# EAGLE board vscore via 1 (EAGLE 6.3), part 1 of 2
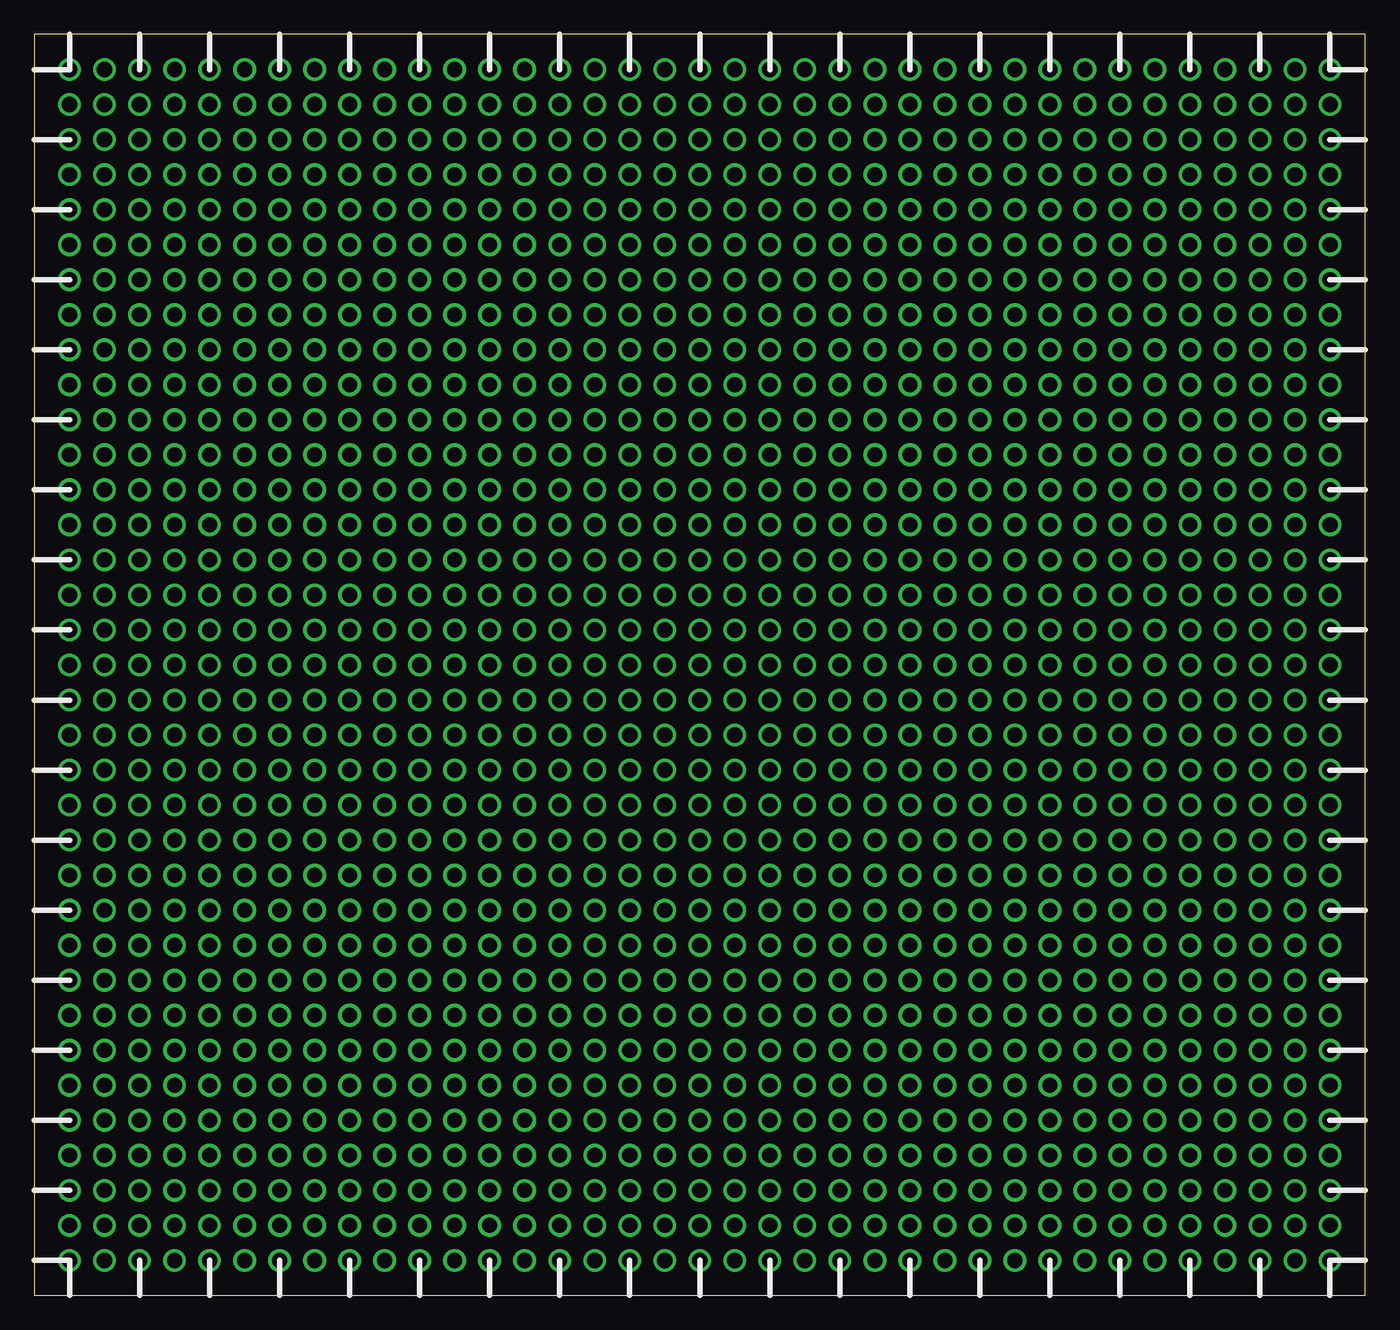
[diagram p0: board, top side]

Size 96.52 x 91.44 mm. Coordinates in mm from the lower left corner, seen from the top.
Outline: 0,0 96.52,0 96.52,91.44 0,91.44 0,0
Copper layers (1*16): Top 0.035mm / dielectric 1.5mm / Bottom 0.035mm
Design rules "default": minimum track width 10mil, minimum drill 24mil, track to track 8mil, track to pad 8mil, pad to pad 8mil, via to via 8mil, smd to smd 8mil, copper to edge 40mil, drill to drill 8mil, minimum pad ring 10mil, minimum via ring 8mil, stop-mask expansion 4mil, vias tented up to drill 0mil, thermal gap 10mil

## Placement (x,y rotation side)
E$1  [IMAGE_GERBER_FRAME]  -50.8,-63.5 0 top  (outside the outline)

## Library data of the parts
E$1 = miniPCB_ENGDWG

## Tracks (layer width: path | path; a pad name or v marks a point on that pad's centre or on a via)
S$1  (via drill 1.1)
  other vias: 2.54,2.54
S$2  (via drill 1.1)
  other vias: 5.08,2.54
S$3  (via drill 1.1)
  other vias: 7.62,2.54
S$4  (via drill 1.1)
  other vias: 10.16,2.54
S$5  (via drill 1.1)
  other vias: 12.7,2.54
S$6  (via drill 1.1)
  other vias: 15.24,2.54
S$7  (via drill 1.1)
  other vias: 17.78,2.54
S$8  (via drill 1.1)
  other vias: 20.32,2.54
S$9  (via drill 1.1)
  other vias: 22.86,2.54
S$10  (via drill 1.1)
  other vias: 25.4,2.54
S$11  (via drill 1.1)
  other vias: 27.94,2.54
S$12  (via drill 1.1)
  other vias: 30.48,2.54
S$13  (via drill 1.1)
  other vias: 33.02,2.54
S$14  (via drill 1.1)
  other vias: 35.56,2.54
S$15  (via drill 1.1)
  other vias: 38.1,2.54
S$16  (via drill 1.1)
  other vias: 40.64,2.54
S$17  (via drill 1.1)
  other vias: 43.18,2.54
S$18  (via drill 1.1)
  other vias: 45.72,2.54
S$19  (via drill 1.1)
  other vias: 48.26,2.54
S$20  (via drill 1.1)
  other vias: 50.8,2.54
S$21  (via drill 1.1)
  other vias: 53.34,2.54
S$22  (via drill 1.1)
  other vias: 55.88,2.54
S$23  (via drill 1.1)
  other vias: 58.42,2.54
S$24  (via drill 1.1)
  other vias: 60.96,2.54
S$25  (via drill 1.1)
  other vias: 63.5,2.54
S$26  (via drill 1.1)
  other vias: 66.04,2.54
S$27  (via drill 1.1)
  other vias: 68.58,2.54
S$28  (via drill 1.1)
  other vias: 71.12,2.54
S$29  (via drill 1.1)
  other vias: 73.66,2.54
S$30  (via drill 1.1)
  other vias: 76.2,2.54
S$31  (via drill 1.1)
  other vias: 78.74,2.54
S$32  (via drill 1.1)
  other vias: 81.28,2.54
S$33  (via drill 1.1)
  other vias: 83.82,2.54
S$34  (via drill 1.1)
  other vias: 86.36,2.54
S$35  (via drill 1.1)
  other vias: 88.9,2.54
S$36  (via drill 1.1)
  other vias: 91.44,2.54
S$37  (via drill 1.1)
  other vias: 93.98,2.54
S$39  (via drill 1.1)
  other vias: 2.54,5.08
S$40  (via drill 1.1)
  other vias: 5.08,5.08
S$41  (via drill 1.1)
  other vias: 7.62,5.08
S$42  (via drill 1.1)
  other vias: 10.16,5.08
S$43  (via drill 1.1)
  other vias: 12.7,5.08
S$44  (via drill 1.1)
  other vias: 15.24,5.08
S$45  (via drill 1.1)
  other vias: 17.78,5.08
S$46  (via drill 1.1)
  other vias: 20.32,5.08
S$47  (via drill 1.1)
  other vias: 22.86,5.08
S$48  (via drill 1.1)
  other vias: 25.4,5.08
S$49  (via drill 1.1)
  other vias: 27.94,5.08
S$50  (via drill 1.1)
  other vias: 30.48,5.08
S$51  (via drill 1.1)
  other vias: 33.02,5.08
S$52  (via drill 1.1)
  other vias: 35.56,5.08
S$53  (via drill 1.1)
  other vias: 38.1,5.08
S$54  (via drill 1.1)
  other vias: 40.64,5.08
S$55  (via drill 1.1)
  other vias: 43.18,5.08
S$56  (via drill 1.1)
  other vias: 45.72,5.08
S$57  (via drill 1.1)
  other vias: 48.26,5.08
S$58  (via drill 1.1)
  other vias: 50.8,5.08
S$59  (via drill 1.1)
  other vias: 53.34,5.08
S$60  (via drill 1.1)
  other vias: 55.88,5.08
S$61  (via drill 1.1)
  other vias: 58.42,5.08
S$62  (via drill 1.1)
  other vias: 60.96,5.08
S$63  (via drill 1.1)
  other vias: 63.5,5.08
S$64  (via drill 1.1)
  other vias: 66.04,5.08
S$65  (via drill 1.1)
  other vias: 68.58,5.08
S$66  (via drill 1.1)
  other vias: 71.12,5.08
S$67  (via drill 1.1)
  other vias: 73.66,5.08
S$68  (via drill 1.1)
  other vias: 76.2,5.08
S$69  (via drill 1.1)
  other vias: 78.74,5.08
S$70  (via drill 1.1)
  other vias: 81.28,5.08
S$71  (via drill 1.1)
  other vias: 83.82,5.08
S$72  (via drill 1.1)
  other vias: 86.36,5.08
S$73  (via drill 1.1)
  other vias: 88.9,5.08
S$74  (via drill 1.1)
  other vias: 91.44,5.08
S$75  (via drill 1.1)
  other vias: 93.98,5.08
S$77  (via drill 1.1)
  other vias: 2.54,7.62
S$78  (via drill 1.1)
  other vias: 5.08,7.62
S$79  (via drill 1.1)
  other vias: 7.62,7.62
S$80  (via drill 1.1)
  other vias: 10.16,7.62
S$81  (via drill 1.1)
  other vias: 12.7,7.62
S$82  (via drill 1.1)
  other vias: 15.24,7.62
S$83  (via drill 1.1)
  other vias: 17.78,7.62
S$84  (via drill 1.1)
  other vias: 20.32,7.62
S$85  (via drill 1.1)
  other vias: 22.86,7.62
S$86  (via drill 1.1)
  other vias: 25.4,7.62
S$87  (via drill 1.1)
  other vias: 27.94,7.62
S$88  (via drill 1.1)
  other vias: 30.48,7.62
S$89  (via drill 1.1)
  other vias: 33.02,7.62
S$90  (via drill 1.1)
  other vias: 35.56,7.62
S$91  (via drill 1.1)
  other vias: 38.1,7.62
S$92  (via drill 1.1)
  other vias: 40.64,7.62
S$93  (via drill 1.1)
  other vias: 43.18,7.62
S$94  (via drill 1.1)
  other vias: 45.72,7.62
S$95  (via drill 1.1)
  other vias: 48.26,7.62
S$96  (via drill 1.1)
  other vias: 50.8,7.62
S$97  (via drill 1.1)
  other vias: 53.34,7.62
S$98  (via drill 1.1)
  other vias: 55.88,7.62
S$99  (via drill 1.1)
  other vias: 58.42,7.62
S$100  (via drill 1.1)
  other vias: 60.96,7.62
S$101  (via drill 1.1)
  other vias: 63.5,7.62
S$102  (via drill 1.1)
  other vias: 66.04,7.62
S$103  (via drill 1.1)
  other vias: 68.58,7.62
S$104  (via drill 1.1)
  other vias: 71.12,7.62
S$105  (via drill 1.1)
  other vias: 73.66,7.62
S$106  (via drill 1.1)
  other vias: 76.2,7.62
S$107  (via drill 1.1)
  other vias: 78.74,7.62
S$108  (via drill 1.1)
  other vias: 81.28,7.62
S$109  (via drill 1.1)
  other vias: 83.82,7.62
S$110  (via drill 1.1)
  other vias: 86.36,7.62
S$111  (via drill 1.1)
  other vias: 88.9,7.62
S$112  (via drill 1.1)
  other vias: 91.44,7.62
S$113  (via drill 1.1)
  other vias: 93.98,7.62
S$115  (via drill 1.1)
  other vias: 2.54,10.16
S$116  (via drill 1.1)
  other vias: 5.08,10.16
S$117  (via drill 1.1)
  other vias: 7.62,10.16
S$118  (via drill 1.1)
  other vias: 10.16,10.16
S$119  (via drill 1.1)
  other vias: 12.7,10.16
S$120  (via drill 1.1)
  other vias: 15.24,10.16
S$121  (via drill 1.1)
  other vias: 17.78,10.16
S$122  (via drill 1.1)
  other vias: 20.32,10.16
S$123  (via drill 1.1)
  other vias: 22.86,10.16
S$124  (via drill 1.1)
  other vias: 25.4,10.16
S$125  (via drill 1.1)
  other vias: 27.94,10.16
S$126  (via drill 1.1)
  other vias: 30.48,10.16
S$127  (via drill 1.1)
  other vias: 33.02,10.16
S$128  (via drill 1.1)
  other vias: 35.56,10.16
S$129  (via drill 1.1)
  other vias: 38.1,10.16
S$130  (via drill 1.1)
  other vias: 40.64,10.16
S$131  (via drill 1.1)
  other vias: 43.18,10.16
S$132  (via drill 1.1)
  other vias: 45.72,10.16
S$133  (via drill 1.1)
  other vias: 48.26,10.16
S$134  (via drill 1.1)
  other vias: 50.8,10.16
S$135  (via drill 1.1)
  other vias: 53.34,10.16
S$136  (via drill 1.1)
  other vias: 55.88,10.16
S$137  (via drill 1.1)
  other vias: 58.42,10.16
S$138  (via drill 1.1)
  other vias: 60.96,10.16
S$139  (via drill 1.1)
  other vias: 63.5,10.16
S$140  (via drill 1.1)
  other vias: 66.04,10.16
S$141  (via drill 1.1)
  other vias: 68.58,10.16
S$142  (via drill 1.1)
  other vias: 71.12,10.16
S$143  (via drill 1.1)
  other vias: 73.66,10.16
S$144  (via drill 1.1)
  other vias: 76.2,10.16
S$145  (via drill 1.1)
  other vias: 78.74,10.16
S$146  (via drill 1.1)
  other vias: 81.28,10.16
S$147  (via drill 1.1)
  other vias: 83.82,10.16
S$148  (via drill 1.1)
  other vias: 86.36,10.16
S$149  (via drill 1.1)
  other vias: 88.9,10.16
S$150  (via drill 1.1)
  other vias: 91.44,10.16
S$151  (via drill 1.1)
  other vias: 93.98,10.16
S$153  (via drill 1.1)
  other vias: 2.54,12.7
S$154  (via drill 1.1)
  other vias: 5.08,12.7
S$155  (via drill 1.1)
  other vias: 7.62,12.7
S$156  (via drill 1.1)
  other vias: 10.16,12.7
S$157  (via drill 1.1)
  other vias: 12.7,12.7
S$158  (via drill 1.1)
  other vias: 15.24,12.7
S$159  (via drill 1.1)
  other vias: 17.78,12.7
S$160  (via drill 1.1)
  other vias: 20.32,12.7
S$161  (via drill 1.1)
  other vias: 22.86,12.7
S$162  (via drill 1.1)
  other vias: 25.4,12.7
S$163  (via drill 1.1)
  other vias: 27.94,12.7
S$164  (via drill 1.1)
  other vias: 30.48,12.7
S$165  (via drill 1.1)
  other vias: 33.02,12.7
S$166  (via drill 1.1)
  other vias: 35.56,12.7
S$167  (via drill 1.1)
  other vias: 38.1,12.7
S$168  (via drill 1.1)
  other vias: 40.64,12.7
S$169  (via drill 1.1)
  other vias: 43.18,12.7
S$170  (via drill 1.1)
  other vias: 45.72,12.7
S$171  (via drill 1.1)
  other vias: 48.26,12.7
S$172  (via drill 1.1)
  other vias: 50.8,12.7
S$173  (via drill 1.1)
  other vias: 53.34,12.7
S$174  (via drill 1.1)
  other vias: 55.88,12.7
S$175  (via drill 1.1)
  other vias: 58.42,12.7
S$176  (via drill 1.1)
  other vias: 60.96,12.7
S$177  (via drill 1.1)
  other vias: 63.5,12.7
S$178  (via drill 1.1)
  other vias: 66.04,12.7
S$179  (via drill 1.1)
  other vias: 68.58,12.7
S$180  (via drill 1.1)
  other vias: 71.12,12.7
S$181  (via drill 1.1)
  other vias: 73.66,12.7
S$182  (via drill 1.1)
  other vias: 76.2,12.7
S$183  (via drill 1.1)
  other vias: 78.74,12.7
S$184  (via drill 1.1)
  other vias: 81.28,12.7
S$185  (via drill 1.1)
  other vias: 83.82,12.7
S$186  (via drill 1.1)
  other vias: 86.36,12.7
S$187  (via drill 1.1)
  other vias: 88.9,12.7
S$188  (via drill 1.1)
  other vias: 91.44,12.7
S$189  (via drill 1.1)
  other vias: 93.98,12.7
S$191  (via drill 1.1)
  other vias: 2.54,15.24
S$192  (via drill 1.1)
  other vias: 5.08,15.24
S$193  (via drill 1.1)
  other vias: 7.62,15.24
S$194  (via drill 1.1)
  other vias: 10.16,15.24
S$195  (via drill 1.1)
  other vias: 12.7,15.24
S$196  (via drill 1.1)
  other vias: 15.24,15.24
S$197  (via drill 1.1)
  other vias: 17.78,15.24
S$198  (via drill 1.1)
  other vias: 20.32,15.24
S$199  (via drill 1.1)
  other vias: 22.86,15.24
S$200  (via drill 1.1)
  other vias: 25.4,15.24
S$201  (via drill 1.1)
  other vias: 27.94,15.24
S$202  (via drill 1.1)
  other vias: 30.48,15.24
S$203  (via drill 1.1)
  other vias: 33.02,15.24
S$204  (via drill 1.1)
  other vias: 35.56,15.24
S$205  (via drill 1.1)
  other vias: 38.1,15.24
S$206  (via drill 1.1)
  other vias: 40.64,15.24
S$207  (via drill 1.1)
  other vias: 43.18,15.24
S$208  (via drill 1.1)
  other vias: 45.72,15.24
S$209  (via drill 1.1)
  other vias: 48.26,15.24
S$210  (via drill 1.1)
  other vias: 50.8,15.24
S$211  (via drill 1.1)
  other vias: 53.34,15.24
S$212  (via drill 1.1)
  other vias: 55.88,15.24
S$213  (via drill 1.1)
  other vias: 58.42,15.24
S$214  (via drill 1.1)
  other vias: 60.96,15.24
S$215  (via drill 1.1)
  other vias: 63.5,15.24
S$216  (via drill 1.1)
  other vias: 66.04,15.24
S$217  (via drill 1.1)
  other vias: 68.58,15.24
S$218  (via drill 1.1)
  other vias: 71.12,15.24
S$219  (via drill 1.1)
  other vias: 73.66,15.24
S$220  (via drill 1.1)
  other vias: 76.2,15.24
S$221  (via drill 1.1)
  other vias: 78.74,15.24
S$222  (via drill 1.1)
  other vias: 81.28,15.24
S$223  (via drill 1.1)
  other vias: 83.82,15.24
S$224  (via drill 1.1)
  other vias: 86.36,15.24
S$225  (via drill 1.1)
  other vias: 88.9,15.24
S$226  (via drill 1.1)
  other vias: 91.44,15.24
S$227  (via drill 1.1)
  other vias: 93.98,15.24
S$229  (via drill 1.1)
  other vias: 2.54,17.78
S$230  (via drill 1.1)
  other vias: 5.08,17.78
S$231  (via drill 1.1)
  other vias: 7.62,17.78
S$232  (via drill 1.1)
  other vias: 10.16,17.78
S$233  (via drill 1.1)
  other vias: 12.7,17.78
S$234  (via drill 1.1)
  other vias: 15.24,17.78
S$235  (via drill 1.1)
  other vias: 17.78,17.78
S$236  (via drill 1.1)
  other vias: 20.32,17.78
S$237  (via drill 1.1)
  other vias: 22.86,17.78
S$238  (via drill 1.1)
  other vias: 25.4,17.78
S$239  (via drill 1.1)
  other vias: 27.94,17.78
S$240  (via drill 1.1)
  other vias: 30.48,17.78
S$241  (via drill 1.1)
  other vias: 33.02,17.78
S$242  (via drill 1.1)
  other vias: 35.56,17.78
S$243  (via drill 1.1)
  other vias: 38.1,17.78
S$244  (via drill 1.1)
  other vias: 40.64,17.78
S$245  (via drill 1.1)
  other vias: 43.18,17.78
S$246  (via drill 1.1)
  other vias: 45.72,17.78
S$247  (via drill 1.1)
  other vias: 48.26,17.78
S$248  (via drill 1.1)
  other vias: 50.8,17.78
S$249  (via drill 1.1)
  other vias: 53.34,17.78
S$250  (via drill 1.1)
  other vias: 55.88,17.78
S$251  (via drill 1.1)
  other vias: 58.42,17.78
S$252  (via drill 1.1)
  other vias: 60.96,17.78
S$253  (via drill 1.1)
  other vias: 63.5,17.78
S$254  (via drill 1.1)
  other vias: 66.04,17.78
S$255  (via drill 1.1)
  other vias: 68.58,17.78
S$256  (via drill 1.1)
  other vias: 71.12,17.78
S$257  (via drill 1.1)
  other vias: 73.66,17.78
S$258  (via drill 1.1)
  other vias: 76.2,17.78
S$259  (via drill 1.1)
  other vias: 78.74,17.78
S$260  (via drill 1.1)
  other vias: 81.28,17.78
S$261  (via drill 1.1)
  other vias: 83.82,17.78
S$262  (via drill 1.1)
  other vias: 86.36,17.78
S$263  (via drill 1.1)
  other vias: 88.9,17.78
S$264  (via drill 1.1)
  other vias: 91.44,17.78
S$265  (via drill 1.1)
  other vias: 93.98,17.78
S$267  (via drill 1.1)
  other vias: 2.54,20.32
S$268  (via drill 1.1)
  other vias: 5.08,20.32
S$269  (via drill 1.1)
  other vias: 7.62,20.32
S$270  (via drill 1.1)
  other vias: 10.16,20.32
S$271  (via drill 1.1)
  other vias: 12.7,20.32
S$272  (via drill 1.1)
  other vias: 15.24,20.32
S$273  (via drill 1.1)
  other vias: 17.78,20.32
S$274  (via drill 1.1)
  other vias: 20.32,20.32
S$275  (via drill 1.1)
  other vias: 22.86,20.32
S$276  (via drill 1.1)
  other vias: 25.4,20.32
S$277  (via drill 1.1)
  other vias: 27.94,20.32
S$278  (via drill 1.1)
  other vias: 30.48,20.32
S$279  (via drill 1.1)
  other vias: 33.02,20.32
S$280  (via drill 1.1)
  other vias: 35.56,20.32
S$281  (via drill 1.1)
  other vias: 38.1,20.32
S$282  (via drill 1.1)
  other vias: 40.64,20.32
S$283  (via drill 1.1)
  other vias: 43.18,20.32
S$284  (via drill 1.1)
  other vias: 45.72,20.32
S$285  (via drill 1.1)
  other vias: 48.26,20.32
S$286  (via drill 1.1)
  other vias: 50.8,20.32
S$287  (via drill 1.1)
  other vias: 53.34,20.32
S$288  (via drill 1.1)
  other vias: 55.88,20.32
S$289  (via drill 1.1)
  other vias: 58.42,20.32
S$290  (via drill 1.1)
  other vias: 60.96,20.32
S$291  (via drill 1.1)
  other vias: 63.5,20.32
S$292  (via drill 1.1)
  other vias: 66.04,20.32
S$293  (via drill 1.1)
  other vias: 68.58,20.32
S$294  (via drill 1.1)
  other vias: 71.12,20.32
S$295  (via drill 1.1)
  other vias: 73.66,20.32
S$296  (via drill 1.1)
  other vias: 76.2,20.32
S$297  (via drill 1.1)
  other vias: 78.74,20.32
S$298  (via drill 1.1)
  other vias: 81.28,20.32
S$299  (via drill 1.1)
  other vias: 83.82,20.32
S$300  (via drill 1.1)
  other vias: 86.36,20.32
S$301  (via drill 1.1)
  other vias: 88.9,20.32
S$302  (via drill 1.1)
  other vias: 91.44,20.32
S$303  (via drill 1.1)
  other vias: 93.98,20.32
S$305  (via drill 1.1)
  other vias: 2.54,22.86
S$306  (via drill 1.1)
  other vias: 5.08,22.86
S$307  (via drill 1.1)
  other vias: 7.62,22.86
S$308  (via drill 1.1)
  other vias: 10.16,22.86
S$309  (via drill 1.1)
  other vias: 12.7,22.86
S$310  (via drill 1.1)
  other vias: 15.24,22.86
S$311  (via drill 1.1)
  other vias: 17.78,22.86
S$312  (via drill 1.1)
  other vias: 20.32,22.86
S$313  (via drill 1.1)
  other vias: 22.86,22.86
S$314  (via drill 1.1)
  other vias: 25.4,22.86
S$315  (via drill 1.1)
  other vias: 27.94,22.86
S$316  (via drill 1.1)
  other vias: 30.48,22.86
S$317  (via drill 1.1)
  other vias: 33.02,22.86
S$318  (via drill 1.1)
  other vias: 35.56,22.86
S$319  (via drill 1.1)
  other vias: 38.1,22.86
S$320  (via drill 1.1)
  other vias: 40.64,22.86
S$321  (via drill 1.1)
  other vias: 43.18,22.86
S$322  (via drill 1.1)
  other vias: 45.72,22.86
S$323  (via drill 1.1)
  other vias: 48.26,22.86
S$324  (via drill 1.1)
  other vias: 50.8,22.86
S$325  (via drill 1.1)
  other vias: 53.34,22.86
S$326  (via drill 1.1)
  other vias: 55.88,22.86
S$327  (via drill 1.1)
  other vias: 58.42,22.86
S$328  (via drill 1.1)
  other vias: 60.96,22.86
S$329  (via drill 1.1)
  other vias: 63.5,22.86
S$330  (via drill 1.1)
  other vias: 66.04,22.86
S$331  (via drill 1.1)
  other vias: 68.58,22.86
S$332  (via drill 1.1)
  other vias: 71.12,22.86
S$333  (via drill 1.1)
  other vias: 73.66,22.86
S$334  (via drill 1.1)
  other vias: 76.2,22.86
S$335  (via drill 1.1)
  other vias: 78.74,22.86
S$336  (via drill 1.1)
  other vias: 81.28,22.86
S$337  (via drill 1.1)
  other vias: 83.82,22.86
S$338  (via drill 1.1)
  other vias: 86.36,22.86
S$339  (via drill 1.1)
  other vias: 88.9,22.86
S$340  (via drill 1.1)
  other vias: 91.44,22.86
S$341  (via drill 1.1)
  other vias: 93.98,22.86
S$343  (via drill 1.1)
  other vias: 2.54,25.4
S$344  (via drill 1.1)
  other vias: 5.08,25.4
S$345  (via drill 1.1)
  other vias: 7.62,25.4
S$346  (via drill 1.1)
  other vias: 10.16,25.4
S$347  (via drill 1.1)
  other vias: 12.7,25.4
S$348  (via drill 1.1)
  other vias: 15.24,25.4
S$349  (via drill 1.1)
  other vias: 17.78,25.4
S$350  (via drill 1.1)
  other vias: 20.32,25.4
S$351  (via drill 1.1)
  other vias: 22.86,25.4
S$352  (via drill 1.1)
  other vias: 25.4,25.4
S$353  (via drill 1.1)
  other vias: 27.94,25.4
S$354  (via drill 1.1)
  other vias: 30.48,25.4
S$355  (via drill 1.1)
  other vias: 33.02,25.4
S$356  (via drill 1.1)
  other vias: 35.56,25.4
S$357  (via drill 1.1)
  other vias: 38.1,25.4
S$358  (via drill 1.1)
  other vias: 40.64,25.4
S$359  (via drill 1.1)
  other vias: 43.18,25.4
S$360  (via drill 1.1)
  other vias: 45.72,25.4
S$361  (via drill 1.1)
  other vias: 48.26,25.4
S$362  (via drill 1.1)
  other vias: 50.8,25.4
S$363  (via drill 1.1)
  other vias: 53.34,25.4
S$364  (via drill 1.1)
  other vias: 55.88,25.4
S$365  (via drill 1.1)
  other vias: 58.42,25.4
S$366  (via drill 1.1)
  other vias: 60.96,25.4
S$367  (via drill 1.1)
  other vias: 63.5,25.4
S$368  (via drill 1.1)
  other vias: 66.04,25.4
S$369  (via drill 1.1)
  other vias: 68.58,25.4
S$370  (via drill 1.1)
  other vias: 71.12,25.4
S$371  (via drill 1.1)
  other vias: 73.66,25.4
S$372  (via drill 1.1)
  other vias: 76.2,25.4
S$373  (via drill 1.1)
  other vias: 78.74,25.4
S$374  (via drill 1.1)
  other vias: 81.28,25.4
S$375  (via drill 1.1)
  other vias: 83.82,25.4
S$376  (via drill 1.1)
  other vias: 86.36,25.4
S$377  (via drill 1.1)
  other vias: 88.9,25.4
S$378  (via drill 1.1)
  other vias: 91.44,25.4
S$379  (via drill 1.1)
  other vias: 93.98,25.4
S$381  (via drill 1.1)
  other vias: 2.54,27.94
S$382  (via drill 1.1)
  other vias: 5.08,27.94
S$383  (via drill 1.1)
  other vias: 7.62,27.94
S$384  (via drill 1.1)
  other vias: 10.16,27.94
S$385  (via drill 1.1)
  other vias: 12.7,27.94
S$386  (via drill 1.1)
  other vias: 15.24,27.94
S$387  (via drill 1.1)
  other vias: 17.78,27.94
S$388  (via drill 1.1)
  other vias: 20.32,27.94
S$389  (via drill 1.1)
  other vias: 22.86,27.94
S$390  (via drill 1.1)
  other vias: 25.4,27.94
S$391  (via drill 1.1)
  other vias: 27.94,27.94
S$392  (via drill 1.1)
  other vias: 30.48,27.94
S$393  (via drill 1.1)
  other vias: 33.02,27.94
S$394  (via drill 1.1)
  other vias: 35.56,27.94
S$395  (via drill 1.1)
  other vias: 38.1,27.94
S$396  (via drill 1.1)
  other vias: 40.64,27.94
S$397  (via drill 1.1)
  other vias: 43.18,27.94
S$398  (via drill 1.1)
  other vias: 45.72,27.94
S$399  (via drill 1.1)
  other vias: 48.26,27.94
S$400  (via drill 1.1)
  other vias: 50.8,27.94
S$401  (via drill 1.1)
  other vias: 53.34,27.94
S$402  (via drill 1.1)
  other vias: 55.88,27.94
S$403  (via drill 1.1)
  other vias: 58.42,27.94
S$404  (via drill 1.1)
  other vias: 60.96,27.94
S$405  (via drill 1.1)
  other vias: 63.5,27.94
S$406  (via drill 1.1)
  other vias: 66.04,27.94
S$407  (via drill 1.1)
  other vias: 68.58,27.94
S$408  (via drill 1.1)
  other vias: 71.12,27.94
S$409  (via drill 1.1)
  other vias: 73.66,27.94
S$410  (via drill 1.1)
  other vias: 76.2,27.94
S$411  (via drill 1.1)
  other vias: 78.74,27.94
S$412  (via drill 1.1)
  other vias: 81.28,27.94
S$413  (via drill 1.1)
  other vias: 83.82,27.94
S$414  (via drill 1.1)
  other vias: 86.36,27.94
S$415  (via drill 1.1)
  other vias: 88.9,27.94
S$416  (via drill 1.1)
  other vias: 91.44,27.94
S$417  (via drill 1.1)
  other vias: 93.98,27.94
S$419  (via drill 1.1)
  other vias: 2.54,30.48
S$420  (via drill 1.1)
  other vias: 5.08,30.48
S$421  (via drill 1.1)
  other vias: 7.62,30.48
S$422  (via drill 1.1)
  other vias: 10.16,30.48
S$423  (via drill 1.1)
  other vias: 12.7,30.48
S$424  (via drill 1.1)
  other vias: 15.24,30.48
S$425  (via drill 1.1)
  other vias: 17.78,30.48
S$426  (via drill 1.1)
  other vias: 20.32,30.48
S$427  (via drill 1.1)
  other vias: 22.86,30.48
S$428  (via drill 1.1)
  other vias: 25.4,30.48
S$429  (via drill 1.1)
  other vias: 27.94,30.48
S$430  (via drill 1.1)
  other vias: 30.48,30.48
S$431  (via drill 1.1)
  other vias: 33.02,30.48
S$432  (via drill 1.1)
  other vias: 35.56,30.48
S$433  (via drill 1.1)
  other vias: 38.1,30.48
S$434  (via drill 1.1)
  other vias: 40.64,30.48
S$435  (via drill 1.1)
  other vias: 43.18,30.48
S$436  (via drill 1.1)
  other vias: 45.72,30.48
S$437  (via drill 1.1)
  other vias: 48.26,30.48
S$438  (via drill 1.1)
  other vias: 50.8,30.48
S$439  (via drill 1.1)
  other vias: 53.34,30.48
S$440  (via drill 1.1)
  other vias: 55.88,30.48
S$441  (via drill 1.1)
  other vias: 58.42,30.48
S$442  (via drill 1.1)
  other vias: 60.96,30.48
S$443  (via drill 1.1)
  other vias: 63.5,30.48
S$444  (via drill 1.1)
  other vias: 66.04,30.48
S$445  (via drill 1.1)
  other vias: 68.58,30.48
S$446  (via drill 1.1)
  other vias: 71.12,30.48
S$447  (via drill 1.1)
  other vias: 73.66,30.48
S$448  (via drill 1.1)
  other vias: 76.2,30.48
S$449  (via drill 1.1)
  other vias: 78.74,30.48
S$450  (via drill 1.1)
  other vias: 81.28,30.48
S$451  (via drill 1.1)
  other vias: 83.82,30.48
S$452  (via drill 1.1)
  other vias: 86.36,30.48
S$453  (via drill 1.1)
  other vias: 88.9,30.48
S$454  (via drill 1.1)
  other vias: 91.44,30.48
S$455  (via drill 1.1)
  other vias: 93.98,30.48
S$457  (via drill 1.1)
  other vias: 2.54,33.02
S$458  (via drill 1.1)
  other vias: 5.08,33.02
S$459  (via drill 1.1)
  other vias: 7.62,33.02
S$460  (via drill 1.1)
  other vias: 10.16,33.02
S$461  (via drill 1.1)
  other vias: 12.7,33.02
S$462  (via drill 1.1)
  other vias: 15.24,33.02
S$463  (via drill 1.1)
  other vias: 17.78,33.02
S$464  (via drill 1.1)
  other vias: 20.32,33.02
S$465  (via drill 1.1)
  other vias: 22.86,33.02
S$466  (via drill 1.1)
  other vias: 25.4,33.02
S$467  (via drill 1.1)
  other vias: 27.94,33.02
S$468  (via drill 1.1)
  other vias: 30.48,33.02
S$469  (via drill 1.1)
  other vias: 33.02,33.02
S$470  (via drill 1.1)
  other vias: 35.56,33.02
S$471  (via drill 1.1)
  other vias: 38.1,33.02
S$472  (via drill 1.1)
  other vias: 40.64,33.02
S$473  (via drill 1.1)
  other vias: 43.18,33.02
S$474  (via drill 1.1)
  other vias: 45.72,33.02
S$475  (via drill 1.1)
  other vias: 48.26,33.02
S$476  (via drill 1.1)
  other vias: 50.8,33.02
S$477  (via drill 1.1)
  other vias: 53.34,33.02
S$478  (via drill 1.1)
  other vias: 55.88,33.02
S$479  (via drill 1.1)
  other vias: 58.42,33.02
S$480  (via drill 1.1)
  other vias: 60.96,33.02
S$481  (via drill 1.1)
  other vias: 63.5,33.02
S$482  (via drill 1.1)
  other vias: 66.04,33.02
S$483  (via drill 1.1)
  other vias: 68.58,33.02
S$484  (via drill 1.1)
  other vias: 71.12,33.02
S$485  (via drill 1.1)
  other vias: 73.66,33.02
S$486  (via drill 1.1)
  other vias: 76.2,33.02
S$487  (via drill 1.1)
  other vias: 78.74,33.02
S$488  (via drill 1.1)
  other vias: 81.28,33.02
S$489  (via drill 1.1)
  other vias: 83.82,33.02
S$490  (via drill 1.1)
  other vias: 86.36,33.02
S$491  (via drill 1.1)
  other vias: 88.9,33.02
S$492  (via drill 1.1)
  other vias: 91.44,33.02
S$493  (via drill 1.1)
  other vias: 93.98,33.02
S$495  (via drill 1.1)
  other vias: 2.54,35.56
S$496  (via drill 1.1)
  other vias: 5.08,35.56
S$497  (via drill 1.1)
  other vias: 7.62,35.56
S$498  (via drill 1.1)
  other vias: 10.16,35.56
S$499  (via drill 1.1)
  other vias: 12.7,35.56
S$500  (via drill 1.1)
  other vias: 15.24,35.56
S$501  (via drill 1.1)
  other vias: 17.78,35.56
S$502  (via drill 1.1)
  other vias: 20.32,35.56
S$503  (via drill 1.1)
  other vias: 22.86,35.56
S$504  (via drill 1.1)
  other vias: 25.4,35.56
S$505  (via drill 1.1)
  other vias: 27.94,35.56
S$506  (via drill 1.1)
  other vias: 30.48,35.56
S$507  (via drill 1.1)
  other vias: 33.02,35.56
S$508  (via drill 1.1)
  other vias: 35.56,35.56
S$509  (via drill 1.1)
  other vias: 38.1,35.56
S$510  (via drill 1.1)
  other vias: 40.64,35.56
S$511  (via drill 1.1)
  other vias: 43.18,35.56
S$512  (via drill 1.1)
  other vias: 45.72,35.56
S$513  (via drill 1.1)
  other vias: 48.26,35.56
S$514  (via drill 1.1)
  other vias: 50.8,35.56
S$515  (via drill 1.1)
  other vias: 53.34,35.56
S$516  (via drill 1.1)
  other vias: 55.88,35.56
S$517  (via drill 1.1)
  other vias: 58.42,35.56
S$518  (via drill 1.1)
  other vias: 60.96,35.56
S$519  (via drill 1.1)
  other vias: 63.5,35.56
S$520  (via drill 1.1)
  other vias: 66.04,35.56
S$521  (via drill 1.1)
  other vias: 68.58,35.56
S$522  (via drill 1.1)
  other vias: 71.12,35.56
S$523  (via drill 1.1)
  other vias: 73.66,35.56
S$524  (via drill 1.1)
  other vias: 76.2,35.56
S$525  (via drill 1.1)
  other vias: 78.74,35.56
S$526  (via drill 1.1)
  other vias: 81.28,35.56
S$527  (via drill 1.1)
  other vias: 83.82,35.56
S$528  (via drill 1.1)
  other vias: 86.36,35.56
S$529  (via drill 1.1)
  other vias: 88.9,35.56
S$530  (via drill 1.1)
  other vias: 91.44,35.56
S$531  (via drill 1.1)
  other vias: 93.98,35.56
S$533  (via drill 1.1)
  other vias: 2.54,38.1
S$534  (via drill 1.1)
  other vias: 5.08,38.1
S$535  (via drill 1.1)
  other vias: 7.62,38.1
S$536  (via drill 1.1)
  other vias: 10.16,38.1
S$537  (via drill 1.1)
  other vias: 12.7,38.1
S$538  (via drill 1.1)
  other vias: 15.24,38.1
S$539  (via drill 1.1)
  other vias: 17.78,38.1
S$540  (via drill 1.1)
  other vias: 20.32,38.1
S$541  (via drill 1.1)
  other vias: 22.86,38.1
S$542  (via drill 1.1)
  other vias: 25.4,38.1
S$543  (via drill 1.1)
  other vias: 27.94,38.1
S$544  (via drill 1.1)
  other vias: 30.48,38.1
S$545  (via drill 1.1)
  other vias: 33.02,38.1
S$546  (via drill 1.1)
  other vias: 35.56,38.1
S$547  (via drill 1.1)
  other vias: 38.1,38.1
S$548  (via drill 1.1)
  other vias: 40.64,38.1
S$549  (via drill 1.1)
  other vias: 43.18,38.1
S$550  (via drill 1.1)
  other vias: 45.72,38.1
S$551  (via drill 1.1)
  other vias: 48.26,38.1
S$552  (via drill 1.1)
  other vias: 50.8,38.1
S$553  (via drill 1.1)
  other vias: 53.34,38.1
S$554  (via drill 1.1)
  other vias: 55.88,38.1
S$555  (via drill 1.1)
  other vias: 58.42,38.1
S$556  (via drill 1.1)
  other vias: 60.96,38.1
S$557  (via drill 1.1)
  other vias: 63.5,38.1
S$558  (via drill 1.1)
  other vias: 66.04,38.1
S$559  (via drill 1.1)
  other vias: 68.58,38.1
S$560  (via drill 1.1)
  other vias: 71.12,38.1
S$561  (via drill 1.1)
  other vias: 73.66,38.1
S$562  (via drill 1.1)
  other vias: 76.2,38.1
S$563  (via drill 1.1)
  other vias: 78.74,38.1
S$564  (via drill 1.1)
  other vias: 81.28,38.1
S$565  (via drill 1.1)
  other vias: 83.82,38.1
S$566  (via drill 1.1)
  other vias: 86.36,38.1
S$567  (via drill 1.1)
  other vias: 88.9,38.1
S$568  (via drill 1.1)
  other vias: 91.44,38.1
S$569  (via drill 1.1)
  other vias: 93.98,38.1
S$571  (via drill 1.1)
  other vias: 2.54,40.64
S$572  (via drill 1.1)
  other vias: 5.08,40.64
S$573  (via drill 1.1)
  other vias: 7.62,40.64
S$574  (via drill 1.1)
  other vias: 10.16,40.64
S$575  (via drill 1.1)
  other vias: 12.7,40.64
S$576  (via drill 1.1)
  other vias: 15.24,40.64
S$577  (via drill 1.1)
  other vias: 17.78,40.64
S$578  (via drill 1.1)
  other vias: 20.32,40.64
S$579  (via drill 1.1)
  other vias: 22.86,40.64
S$580  (via drill 1.1)
  other vias: 25.4,40.64
S$581  (via drill 1.1)
  other vias: 27.94,40.64
S$582  (via drill 1.1)
  other vias: 30.48,40.64
S$583  (via drill 1.1)
  other vias: 33.02,40.64
S$584  (via drill 1.1)
  other vias: 35.56,40.64
S$585  (via drill 1.1)
  other vias: 38.1,40.64
S$586  (via drill 1.1)
  other vias: 40.64,40.64
S$587  (via drill 1.1)
  other vias: 43.18,40.64
S$588  (via drill 1.1)
  other vias: 45.72,40.64
S$589  (via drill 1.1)
  other vias: 48.26,40.64
S$590  (via drill 1.1)
  other vias: 50.8,40.64
S$591  (via drill 1.1)
  other vias: 53.34,40.64
S$592  (via drill 1.1)
  other vias: 55.88,40.64
S$593  (via drill 1.1)
  other vias: 58.42,40.64
S$594  (via drill 1.1)
  other vias: 60.96,40.64
S$595  (via drill 1.1)
  other vias: 63.5,40.64
S$596  (via drill 1.1)
  other vias: 66.04,40.64
S$597  (via drill 1.1)
  other vias: 68.58,40.64
S$598  (via drill 1.1)
  other vias: 71.12,40.64
S$599  (via drill 1.1)
  other vias: 73.66,40.64
S$600  (via drill 1.1)
  other vias: 76.2,40.64
S$601  (via drill 1.1)
  other vias: 78.74,40.64
S$602  (via drill 1.1)
  other vias: 81.28,40.64
S$603  (via drill 1.1)
  other vias: 83.82,40.64
S$604  (via drill 1.1)
  other vias: 86.36,40.64
S$605  (via drill 1.1)
  other vias: 88.9,40.64
S$606  (via drill 1.1)
  other vias: 91.44,40.64
S$607  (via drill 1.1)
  other vias: 93.98,40.64
S$609  (via drill 1.1)
  other vias: 2.54,43.18
S$610  (via drill 1.1)
  other vias: 5.08,43.18
S$611  (via drill 1.1)
  other vias: 7.62,43.18
S$612  (via drill 1.1)
  other vias: 10.16,43.18
S$613  (via drill 1.1)
  other vias: 12.7,43.18
S$614  (via drill 1.1)
  other vias: 15.24,43.18
S$615  (via drill 1.1)
  other vias: 17.78,43.18
S$616  (via drill 1.1)
  other vias: 20.32,43.18
S$617  (via drill 1.1)
  other vias: 22.86,43.18
S$618  (via drill 1.1)
  other vias: 25.4,43.18
S$619  (via drill 1.1)
  other vias: 27.94,43.18
S$620  (via drill 1.1)
  other vias: 30.48,43.18
S$621  (via drill 1.1)
  other vias: 33.02,43.18
S$622  (via drill 1.1)
  other vias: 35.56,43.18
S$623  (via drill 1.1)
  other vias: 38.1,43.18
S$624  (via drill 1.1)
  other vias: 40.64,43.18
S$625  (via drill 1.1)
  other vias: 43.18,43.18
S$626  (via drill 1.1)
  other vias: 45.72,43.18
S$627  (via drill 1.1)
  other vias: 48.26,43.18
S$628  (via drill 1.1)
  other vias: 50.8,43.18
S$629  (via drill 1.1)
  other vias: 53.34,43.18
S$630  (via drill 1.1)
  other vias: 55.88,43.18
S$631  (via drill 1.1)
  other vias: 58.42,43.18
S$632  (via drill 1.1)
  other vias: 60.96,43.18
S$633  (via drill 1.1)
  other vias: 63.5,43.18
S$634  (via drill 1.1)
  other vias: 66.04,43.18
S$635  (via drill 1.1)
  other vias: 68.58,43.18
S$636  (via drill 1.1)
  other vias: 71.12,43.18
S$637  (via drill 1.1)
  other vias: 73.66,43.18
S$638  (via drill 1.1)
  other vias: 76.2,43.18
S$639  (via drill 1.1)
  other vias: 78.74,43.18
S$640  (via drill 1.1)
  other vias: 81.28,43.18
S$641  (via drill 1.1)
  other vias: 83.82,43.18
S$642  (via drill 1.1)
  other vias: 86.36,43.18
S$643  (via drill 1.1)
  other vias: 88.9,43.18
S$644  (via drill 1.1)
  other vias: 91.44,43.18
S$645  (via drill 1.1)
  other vias: 93.98,43.18
S$647  (via drill 1.1)
  other vias: 2.54,45.72
S$648  (via drill 1.1)
  other vias: 5.08,45.72
S$649  (via drill 1.1)
  other vias: 7.62,45.72
S$650  (via drill 1.1)
  other vias: 10.16,45.72
S$651  (via drill 1.1)
  other vias: 12.7,45.72
S$652  (via drill 1.1)
  other vias: 15.24,45.72
S$653  (via drill 1.1)
  other vias: 17.78,45.72
S$654  (via drill 1.1)
  other vias: 20.32,45.72
S$655  (via drill 1.1)
  other vias: 22.86,45.72
S$656  (via drill 1.1)
  other vias: 25.4,45.72
S$657  (via drill 1.1)
  other vias: 27.94,45.72
S$658  (via drill 1.1)
  other vias: 30.48,45.72
S$659  (via drill 1.1)
  other vias: 33.02,45.72
S$660  (via drill 1.1)
  other vias: 35.56,45.72
S$661  (via drill 1.1)
  other vias: 38.1,45.72
S$662  (via drill 1.1)
  other vias: 40.64,45.72
S$663  (via drill 1.1)
  other vias: 43.18,45.72
S$664  (via drill 1.1)
  other vias: 45.72,45.72
S$665  (via drill 1.1)
  other vias: 48.26,45.72
S$666  (via drill 1.1)
  other vias: 50.8,45.72
S$667  (via drill 1.1)
  other vias: 53.34,45.72
S$668  (via drill 1.1)
  other vias: 55.88,45.72
S$669  (via drill 1.1)
  other vias: 58.42,45.72
S$670  (via drill 1.1)
  other vias: 60.96,45.72
S$671  (via drill 1.1)
  other vias: 63.5,45.72
S$672  (via drill 1.1)
  other vias: 66.04,45.72
S$673  (via drill 1.1)
  other vias: 68.58,45.72
S$674  (via drill 1.1)
  other vias: 71.12,45.72
S$675  (via drill 1.1)
  other vias: 73.66,45.72
S$676  (via drill 1.1)
  other vias: 76.2,45.72
S$677  (via drill 1.1)
  other vias: 78.74,45.72
S$678  (via drill 1.1)
  other vias: 81.28,45.72
S$679  (via drill 1.1)
  other vias: 83.82,45.72
S$680  (via drill 1.1)
  other vias: 86.36,45.72
S$681  (via drill 1.1)
  other vias: 88.9,45.72
S$682  (via drill 1.1)
  other vias: 91.44,45.72
S$683  (via drill 1.1)
  other vias: 93.98,45.72
S$685  (via drill 1.1)
  other vias: 2.54,48.26
S$686  (via drill 1.1)
  other vias: 5.08,48.26
S$687  (via drill 1.1)
  other vias: 7.62,48.26
S$688  (via drill 1.1)
  other vias: 10.16,48.26
S$689  (via drill 1.1)
  other vias: 12.7,48.26
S$690  (via drill 1.1)
  other vias: 15.24,48.26
S$691  (via drill 1.1)
  other vias: 17.78,48.26
S$692  (via drill 1.1)
  other vias: 20.32,48.26
S$693  (via drill 1.1)
  other vias: 22.86,48.26
S$694  (via drill 1.1)
  other vias: 25.4,48.26
S$695  (via drill 1.1)
  other vias: 27.94,48.26
S$696  (via drill 1.1)
  other vias: 30.48,48.26
S$697  (via drill 1.1)
  other vias: 33.02,48.26
S$698  (via drill 1.1)
  other vias: 35.56,48.26
S$699  (via drill 1.1)
  other vias: 38.1,48.26
S$700  (via drill 1.1)
  other vias: 40.64,48.26
S$701  (via drill 1.1)
  other vias: 43.18,48.26
S$702  (via drill 1.1)
  other vias: 45.72,48.26
S$703  (via drill 1.1)
  other vias: 48.26,48.26
S$704  (via drill 1.1)
  other vias: 50.8,48.26
S$705  (via drill 1.1)
  other vias: 53.34,48.26
S$706  (via drill 1.1)
  other vias: 55.88,48.26
S$707  (via drill 1.1)
  other vias: 58.42,48.26
S$708  (via drill 1.1)
  other vias: 60.96,48.26
S$709  (via drill 1.1)
  other vias: 63.5,48.26
S$710  (via drill 1.1)
  other vias: 66.04,48.26
S$711  (via drill 1.1)
  other vias: 68.58,48.26
S$712  (via drill 1.1)
  other vias: 71.12,48.26
S$713  (via drill 1.1)
  other vias: 73.66,48.26
S$714  (via drill 1.1)
  other vias: 76.2,48.26
S$715  (via drill 1.1)
  other vias: 78.74,48.26
S$716  (via drill 1.1)
  other vias: 81.28,48.26
S$717  (via drill 1.1)
  other vias: 83.82,48.26
S$718  (via drill 1.1)
  other vias: 86.36,48.26
S$719  (via drill 1.1)
  other vias: 88.9,48.26
S$720  (via drill 1.1)
  other vias: 91.44,48.26
S$721  (via drill 1.1)
  other vias: 93.98,48.26
S$723  (via drill 1.1)
  other vias: 2.54,50.8
S$724  (via drill 1.1)
  other vias: 5.08,50.8
S$725  (via drill 1.1)
  other vias: 7.62,50.8
S$726  (via drill 1.1)
  other vias: 10.16,50.8
S$727  (via drill 1.1)
  other vias: 12.7,50.8
S$728  (via drill 1.1)
  other vias: 15.24,50.8
S$729  (via drill 1.1)
  other vias: 17.78,50.8
S$730  (via drill 1.1)
  other vias: 20.32,50.8
S$731  (via drill 1.1)
  other vias: 22.86,50.8
S$732  (via drill 1.1)
  other vias: 25.4,50.8
S$733  (via drill 1.1)
  other vias: 27.94,50.8
S$734  (via drill 1.1)
  other vias: 30.48,50.8
S$735  (via drill 1.1)
  other vias: 33.02,50.8
S$736  (via drill 1.1)
  other vias: 35.56,50.8
S$737  (via drill 1.1)
  other vias: 38.1,50.8
S$738  (via drill 1.1)
  other vias: 40.64,50.8
S$739  (via drill 1.1)
  other vias: 43.18,50.8
S$740  (via drill 1.1)
  other vias: 45.72,50.8
S$741  (via drill 1.1)
  other vias: 48.26,50.8
S$742  (via drill 1.1)
  other vias: 50.8,50.8
S$743  (via drill 1.1)
  other vias: 53.34,50.8
S$744  (via drill 1.1)
  other vias: 55.88,50.8
S$745  (via drill 1.1)
  other vias: 58.42,50.8
S$746  (via drill 1.1)
  other vias: 60.96,50.8
S$747  (via drill 1.1)
  other vias: 63.5,50.8
S$748  (via drill 1.1)
  other vias: 66.04,50.8
S$749  (via drill 1.1)
  other vias: 68.58,50.8
S$750  (via drill 1.1)
  other vias: 71.12,50.8
S$751  (via drill 1.1)
  other vias: 73.66,50.8
S$752  (via drill 1.1)
  other vias: 76.2,50.8
S$753  (via drill 1.1)
  other vias: 78.74,50.8
S$754  (via drill 1.1)
  other vias: 81.28,50.8
S$755  (via drill 1.1)
  other vias: 83.82,50.8
S$756  (via drill 1.1)
  other vias: 86.36,50.8
S$757  (via drill 1.1)
  other vias: 88.9,50.8
S$758  (via drill 1.1)
  other vias: 91.44,50.8
S$759  (via drill 1.1)
  other vias: 93.98,50.8
S$761  (via drill 1.1)
  other vias: 2.54,53.34
S$762  (via drill 1.1)
  other vias: 5.08,53.34
S$763  (via drill 1.1)
  other vias: 7.62,53.34
S$764  (via drill 1.1)
  other vias: 10.16,53.34
S$765  (via drill 1.1)
  other vias: 12.7,53.34
S$766  (via drill 1.1)
  other vias: 15.24,53.34
S$767  (via drill 1.1)
  other vias: 17.78,53.34
S$768  (via drill 1.1)
  other vias: 20.32,53.34
S$769  (via drill 1.1)
  other vias: 22.86,53.34
S$770  (via drill 1.1)
  other vias: 25.4,53.34
S$771  (via drill 1.1)
  other vias: 27.94,53.34
S$772  (via drill 1.1)
  other vias: 30.48,53.34
S$773  (via drill 1.1)
  other vias: 33.02,53.34
S$774  (via drill 1.1)
  other vias: 35.56,53.34
S$775  (via drill 1.1)
  other vias: 38.1,53.34
S$776  (via drill 1.1)
  other vias: 40.64,53.34
S$777  (via drill 1.1)
  other vias: 43.18,53.34
S$778  (via drill 1.1)
  other vias: 45.72,53.34
S$779  (via drill 1.1)
  other vias: 48.26,53.34
S$780  (via drill 1.1)
  other vias: 50.8,53.34
S$781  (via drill 1.1)
  other vias: 53.34,53.34
S$782  (via drill 1.1)
  other vias: 55.88,53.34
S$783  (via drill 1.1)
  other vias: 58.42,53.34
S$784  (via drill 1.1)
  other vias: 60.96,53.34
S$785  (via drill 1.1)
  other vias: 63.5,53.34
S$786  (via drill 1.1)
  other vias: 66.04,53.34
S$787  (via drill 1.1)
  other vias: 68.58,53.34
S$788  (via drill 1.1)
  other vias: 71.12,53.34
S$789  (via drill 1.1)
  other vias: 73.66,53.34
S$790  (via drill 1.1)
  other vias: 76.2,53.34
S$791  (via drill 1.1)
  other vias: 78.74,53.34
S$792  (via drill 1.1)
  other vias: 81.28,53.34
S$793  (via drill 1.1)
  other vias: 83.82,53.34
S$794  (via drill 1.1)
  other vias: 86.36,53.34
S$795  (via drill 1.1)
  other vias: 88.9,53.34
S$796  (via drill 1.1)
  other vias: 91.44,53.34
S$797  (via drill 1.1)
  other vias: 93.98,53.34
S$799  (via drill 1.1)
  other vias: 2.54,55.88
S$800  (via drill 1.1)
  other vias: 5.08,55.88
S$801  (via drill 1.1)
  other vias: 7.62,55.88
S$802  (via drill 1.1)
  other vias: 10.16,55.88
S$803  (via drill 1.1)
  other vias: 12.7,55.88
S$804  (via drill 1.1)
  other vias: 15.24,55.88
S$805  (via drill 1.1)
  other vias: 17.78,55.88
S$806  (via drill 1.1)
  other vias: 20.32,55.88
S$807  (via drill 1.1)
  other vias: 22.86,55.88
S$808  (via drill 1.1)
  other vias: 25.4,55.88
S$809  (via drill 1.1)
  other vias: 27.94,55.88
S$810  (via drill 1.1)
  other vias: 30.48,55.88
S$811  (via drill 1.1)
  other vias: 33.02,55.88
S$812  (via drill 1.1)
  other vias: 35.56,55.88
S$813  (via drill 1.1)
  other vias: 38.1,55.88
S$814  (via drill 1.1)
  other vias: 40.64,55.88
S$815  (via drill 1.1)
  other vias: 43.18,55.88
S$816  (via drill 1.1)
  other vias: 45.72,55.88
S$817  (via drill 1.1)
  other vias: 48.26,55.88
S$818  (via drill 1.1)
  other vias: 50.8,55.88
S$819  (via drill 1.1)
  other vias: 53.34,55.88
S$820  (via drill 1.1)
  other vias: 55.88,55.88
S$821  (via drill 1.1)
  other vias: 58.42,55.88
S$822  (via drill 1.1)
  other vias: 60.96,55.88
S$823  (via drill 1.1)
  other vias: 63.5,55.88
S$824  (via drill 1.1)
  other vias: 66.04,55.88
S$825  (via drill 1.1)
  other vias: 68.58,55.88
S$826  (via drill 1.1)
  other vias: 71.12,55.88
S$827  (via drill 1.1)
  other vias: 73.66,55.88
S$828  (via drill 1.1)
  other vias: 76.2,55.88
S$829  (via drill 1.1)
  other vias: 78.74,55.88
S$830  (via drill 1.1)
  other vias: 81.28,55.88
S$831  (via drill 1.1)
  other vias: 83.82,55.88
S$832  (via drill 1.1)
  other vias: 86.36,55.88
S$833  (via drill 1.1)
  other vias: 88.9,55.88
S$834  (via drill 1.1)
  other vias: 91.44,55.88
S$835  (via drill 1.1)
  other vias: 93.98,55.88
S$837  (via drill 1.1)
  other vias: 2.54,58.42
S$838  (via drill 1.1)
  other vias: 5.08,58.42
S$839  (via drill 1.1)
  other vias: 7.62,58.42
S$840  (via drill 1.1)
  other vias: 10.16,58.42
S$841  (via drill 1.1)
  other vias: 12.7,58.42
S$842  (via drill 1.1)
  other vias: 15.24,58.42
S$843  (via drill 1.1)
  other vias: 17.78,58.42
S$844  (via drill 1.1)
  other vias: 20.32,58.42
S$845  (via drill 1.1)
  other vias: 22.86,58.42
S$846  (via drill 1.1)
  other vias: 25.4,58.42
S$847  (via drill 1.1)
  other vias: 27.94,58.42
S$848  (via drill 1.1)
  other vias: 30.48,58.42
S$849  (via drill 1.1)
  other vias: 33.02,58.42
S$850  (via drill 1.1)
  other vias: 35.56,58.42
S$851  (via drill 1.1)
  other vias: 38.1,58.42
S$852  (via drill 1.1)
  other vias: 40.64,58.42
S$853  (via drill 1.1)
  other vias: 43.18,58.42
S$854  (via drill 1.1)
  other vias: 45.72,58.42
S$855  (via drill 1.1)
  other vias: 48.26,58.42
S$856  (via drill 1.1)
  other vias: 50.8,58.42
S$857  (via drill 1.1)
  other vias: 53.34,58.42
S$858  (via drill 1.1)
  other vias: 55.88,58.42
S$859  (via drill 1.1)
  other vias: 58.42,58.42
S$860  (via drill 1.1)
  other vias: 60.96,58.42
S$861  (via drill 1.1)
  other vias: 63.5,58.42
S$862  (via drill 1.1)
  other vias: 66.04,58.42
S$863  (via drill 1.1)
  other vias: 68.58,58.42
S$864  (via drill 1.1)
  other vias: 71.12,58.42
S$865  (via drill 1.1)
  other vias: 73.66,58.42
S$866  (via drill 1.1)
  other vias: 76.2,58.42
S$867  (via drill 1.1)
  other vias: 78.74,58.42
S$868  (via drill 1.1)
  other vias: 81.28,58.42
S$869  (via drill 1.1)
  other vias: 83.82,58.42
S$870  (via drill 1.1)
  other vias: 86.36,58.42
S$871  (via drill 1.1)
  other vias: 88.9,58.42
S$872  (via drill 1.1)
  other vias: 91.44,58.42
S$873  (via drill 1.1)
  other vias: 93.98,58.42
S$875  (via drill 1.1)
  other vias: 2.54,60.96
S$876  (via drill 1.1)
  other vias: 5.08,60.96
S$877  (via drill 1.1)
  other vias: 7.62,60.96
S$878  (via drill 1.1)
  other vias: 10.16,60.96
S$879  (via drill 1.1)
  other vias: 12.7,60.96
S$880  (via drill 1.1)
  other vias: 15.24,60.96
S$881  (via drill 1.1)
  other vias: 17.78,60.96
S$882  (via drill 1.1)
  other vias: 20.32,60.96
S$883  (via drill 1.1)
  other vias: 22.86,60.96
S$884  (via drill 1.1)
  other vias: 25.4,60.96
S$885  (via drill 1.1)
  other vias: 27.94,60.96
S$886  (via drill 1.1)
  other vias: 30.48,60.96
S$887  (via drill 1.1)
  other vias: 33.02,60.96
S$888  (via drill 1.1)
  other vias: 35.56,60.96
S$889  (via drill 1.1)
  other vias: 38.1,60.96
S$890  (via drill 1.1)
  other vias: 40.64,60.96
S$891  (via drill 1.1)
  other vias: 43.18,60.96
S$892  (via drill 1.1)
  other vias: 45.72,60.96
S$893  (via drill 1.1)
  other vias: 48.26,60.96
S$894  (via drill 1.1)
  other vias: 50.8,60.96
S$895  (via drill 1.1)
  other vias: 53.34,60.96
S$896  (via drill 1.1)
  other vias: 55.88,60.96
S$897  (via drill 1.1)
  other vias: 58.42,60.96
S$898  (via drill 1.1)
  other vias: 60.96,60.96
S$899  (via drill 1.1)
  other vias: 63.5,60.96
S$900  (via drill 1.1)
  other vias: 66.04,60.96
S$901  (via drill 1.1)
  other vias: 68.58,60.96
S$902  (via drill 1.1)
  other vias: 71.12,60.96
S$903  (via drill 1.1)
  other vias: 73.66,60.96
S$904  (via drill 1.1)
  other vias: 76.2,60.96
S$905  (via drill 1.1)
  other vias: 78.74,60.96
S$906  (via drill 1.1)
  other vias: 81.28,60.96
S$907  (via drill 1.1)
  other vias: 83.82,60.96
S$908  (via drill 1.1)
  other vias: 86.36,60.96
S$909  (via drill 1.1)
  other vias: 88.9,60.96
S$910  (via drill 1.1)
  other vias: 91.44,60.96
S$911  (via drill 1.1)
  other vias: 93.98,60.96
S$913  (via drill 1.1)
  other vias: 2.54,63.5
S$914  (via drill 1.1)
  other vias: 5.08,63.5
S$915  (via drill 1.1)
  other vias: 7.62,63.5
S$916  (via drill 1.1)
  other vias: 10.16,63.5
S$917  (via drill 1.1)
  other vias: 12.7,63.5
S$918  (via drill 1.1)
  other vias: 15.24,63.5
S$919  (via drill 1.1)
  other vias: 17.78,63.5
S$920  (via drill 1.1)
  other vias: 20.32,63.5
S$921  (via drill 1.1)
  other vias: 22.86,63.5
S$922  (via drill 1.1)
  other vias: 25.4,63.5
S$923  (via drill 1.1)
  other vias: 27.94,63.5
S$924  (via drill 1.1)
  other vias: 30.48,63.5
S$925  (via drill 1.1)
  other vias: 33.02,63.5
S$926  (via drill 1.1)
  other vias: 35.56,63.5
S$927  (via drill 1.1)
  other vias: 38.1,63.5
S$928  (via drill 1.1)
  other vias: 40.64,63.5
S$929  (via drill 1.1)
  other vias: 43.18,63.5
S$930  (via drill 1.1)
  other vias: 45.72,63.5
S$931  (via drill 1.1)
  other vias: 48.26,63.5
S$932  (via drill 1.1)
  other vias: 50.8,63.5
S$933  (via drill 1.1)
  other vias: 53.34,63.5
S$934  (via drill 1.1)
  other vias: 55.88,63.5
S$935  (via drill 1.1)
  other vias: 58.42,63.5
S$936  (via drill 1.1)
  other vias: 60.96,63.5
S$937  (via drill 1.1)
  other vias: 63.5,63.5
S$938  (via drill 1.1)
  other vias: 66.04,63.5
S$939  (via drill 1.1)
  other vias: 68.58,63.5
S$940  (via drill 1.1)
  other vias: 71.12,63.5
S$941  (via drill 1.1)
  other vias: 73.66,63.5
S$942  (via drill 1.1)
  other vias: 76.2,63.5
S$943  (via drill 1.1)
  other vias: 78.74,63.5
S$944  (via drill 1.1)
  other vias: 81.28,63.5
S$945  (via drill 1.1)
  other vias: 83.82,63.5
S$946  (via drill 1.1)
  other vias: 86.36,63.5
S$947  (via drill 1.1)
  other vias: 88.9,63.5
S$948  (via drill 1.1)
  other vias: 91.44,63.5
S$949  (via drill 1.1)
  other vias: 93.98,63.5
S$951  (via drill 1.1)
  other vias: 2.54,66.04
S$952  (via drill 1.1)
  other vias: 5.08,66.04
S$953  (via drill 1.1)
  other vias: 7.62,66.04
S$954  (via drill 1.1)
  other vias: 10.16,66.04
S$955  (via drill 1.1)
  other vias: 12.7,66.04
S$956  (via drill 1.1)
  other vias: 15.24,66.04
S$957  (via drill 1.1)
  other vias: 17.78,66.04
S$958  (via drill 1.1)
  other vias: 20.32,66.04
S$959  (via drill 1.1)
  other vias: 22.86,66.04
S$960  (via drill 1.1)
  other vias: 25.4,66.04
S$961  (via drill 1.1)
  other vias: 27.94,66.04
S$962  (via drill 1.1)
  other vias: 30.48,66.04
S$963  (via drill 1.1)
  other vias: 33.02,66.04
S$964  (via drill 1.1)
  other vias: 35.56,66.04
S$965  (via drill 1.1)
  other vias: 38.1,66.04
S$966  (via drill 1.1)
  other vias: 40.64,66.04
S$967  (via drill 1.1)
  other vias: 43.18,66.04
S$968  (via drill 1.1)
  other vias: 45.72,66.04
S$969  (via drill 1.1)
  other vias: 48.26,66.04
S$970  (via drill 1.1)
  other vias: 50.8,66.04
S$971  (via drill 1.1)
  other vias: 53.34,66.04
S$972  (via drill 1.1)
  other vias: 55.88,66.04
S$973  (via drill 1.1)
  other vias: 58.42,66.04
S$974  (via drill 1.1)
  other vias: 60.96,66.04
S$975  (via drill 1.1)
  other vias: 63.5,66.04
S$976  (via drill 1.1)
  other vias: 66.04,66.04
S$977  (via drill 1.1)
  other vias: 68.58,66.04
S$978  (via drill 1.1)
  other vias: 71.12,66.04
S$979  (via drill 1.1)
  other vias: 73.66,66.04
S$980  (via drill 1.1)
  other vias: 76.2,66.04
S$981  (via drill 1.1)
  other vias: 78.74,66.04
S$982  (via drill 1.1)
  other vias: 81.28,66.04
S$983  (via drill 1.1)
  other vias: 83.82,66.04
S$984  (via drill 1.1)
  other vias: 86.36,66.04
S$985  (via drill 1.1)
  other vias: 88.9,66.04
S$986  (via drill 1.1)
  other vias: 91.44,66.04
S$987  (via drill 1.1)
  other vias: 93.98,66.04
S$989  (via drill 1.1)
  other vias: 2.54,68.58
S$990  (via drill 1.1)
  other vias: 5.08,68.58
S$991  (via drill 1.1)
  other vias: 7.62,68.58
S$992  (via drill 1.1)
  other vias: 10.16,68.58
S$993  (via drill 1.1)
  other vias: 12.7,68.58
S$994  (via drill 1.1)
  other vias: 15.24,68.58
S$995  (via drill 1.1)
  other vias: 17.78,68.58
S$996  (via drill 1.1)
  other vias: 20.32,68.58
S$997  (via drill 1.1)
  other vias: 22.86,68.58
S$998  (via drill 1.1)
  other vias: 25.4,68.58
S$999  (via drill 1.1)
  other vias: 27.94,68.58
S$1000  (via drill 1.1)
  other vias: 30.48,68.58
S$1001  (via drill 1.1)
  other vias: 33.02,68.58
S$1002  (via drill 1.1)
  other vias: 35.56,68.58
S$1003  (via drill 1.1)
  other vias: 38.1,68.58
S$1004  (via drill 1.1)
  other vias: 40.64,68.58
S$1005  (via drill 1.1)
  other vias: 43.18,68.58
S$1006  (via drill 1.1)
  other vias: 45.72,68.58
S$1007  (via drill 1.1)
  other vias: 48.26,68.58
S$1008  (via drill 1.1)
  other vias: 50.8,68.58
S$1009  (via drill 1.1)
  other vias: 53.34,68.58
S$1010  (via drill 1.1)
  other vias: 55.88,68.58
S$1011  (via drill 1.1)
  other vias: 58.42,68.58
S$1012  (via drill 1.1)
  other vias: 60.96,68.58
S$1013  (via drill 1.1)
  other vias: 63.5,68.58
S$1014  (via drill 1.1)
  other vias: 66.04,68.58
S$1015  (via drill 1.1)
  other vias: 68.58,68.58
S$1016  (via drill 1.1)
  other vias: 71.12,68.58
S$1017  (via drill 1.1)
  other vias: 73.66,68.58
S$1018  (via drill 1.1)
  other vias: 76.2,68.58
S$1019  (via drill 1.1)
  other vias: 78.74,68.58
S$1020  (via drill 1.1)
  other vias: 81.28,68.58
S$1021  (via drill 1.1)
  other vias: 83.82,68.58
S$1022  (via drill 1.1)
  other vias: 86.36,68.58
S$1023  (via drill 1.1)
  other vias: 88.9,68.58
S$1024  (via drill 1.1)
  other vias: 91.44,68.58
S$1025  (via drill 1.1)
  other vias: 93.98,68.58
S$1027  (via drill 1.1)
  other vias: 2.54,71.12
S$1028  (via drill 1.1)
  other vias: 5.08,71.12
S$1029  (via drill 1.1)
  other vias: 7.62,71.12
S$1030  (via drill 1.1)
  other vias: 10.16,71.12
S$1031  (via drill 1.1)
  other vias: 12.7,71.12
S$1032  (via drill 1.1)
  other vias: 15.24,71.12
S$1033  (via drill 1.1)
  other vias: 17.78,71.12
S$1034  (via drill 1.1)
  other vias: 20.32,71.12
S$1035  (via drill 1.1)
  other vias: 22.86,71.12
S$1036  (via drill 1.1)
  other vias: 25.4,71.12
S$1037  (via drill 1.1)
  other vias: 27.94,71.12
S$1038  (via drill 1.1)
  other vias: 30.48,71.12